# Altium PCB PCB3_Datchiki.PcbDoc
Units mm, origin at the board's own origin, x right, y up, seen from the top; angles counter-clockwise.
Board outline 25 x 25 mm, 2 copper layers (Top Layer, Bottom Layer), stack 1.57 mm thick; 16 components, 37 nets, 54 pads, 21 vias.
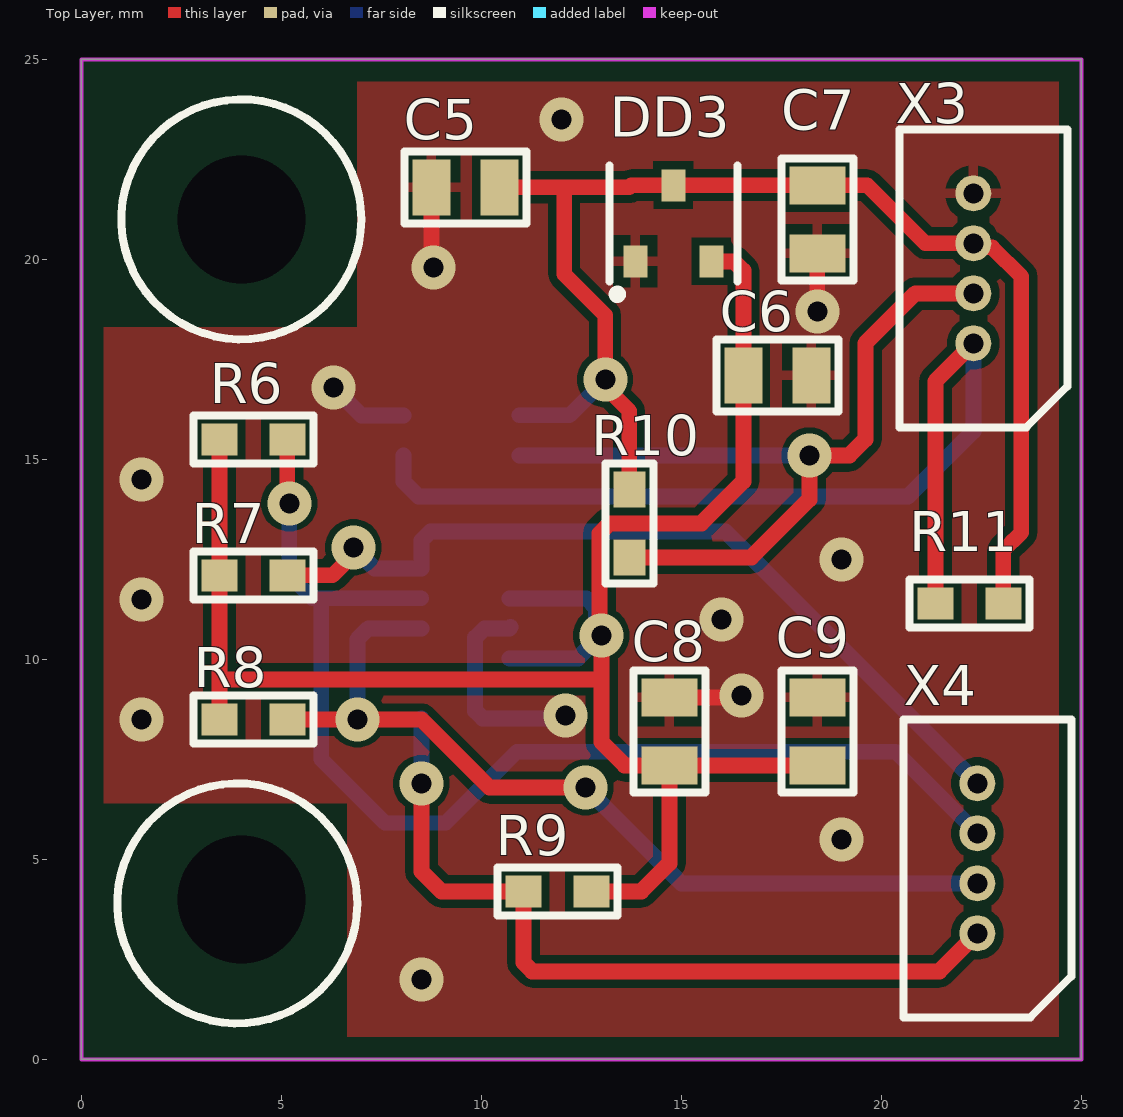
[diagram p0: Top Layer view]
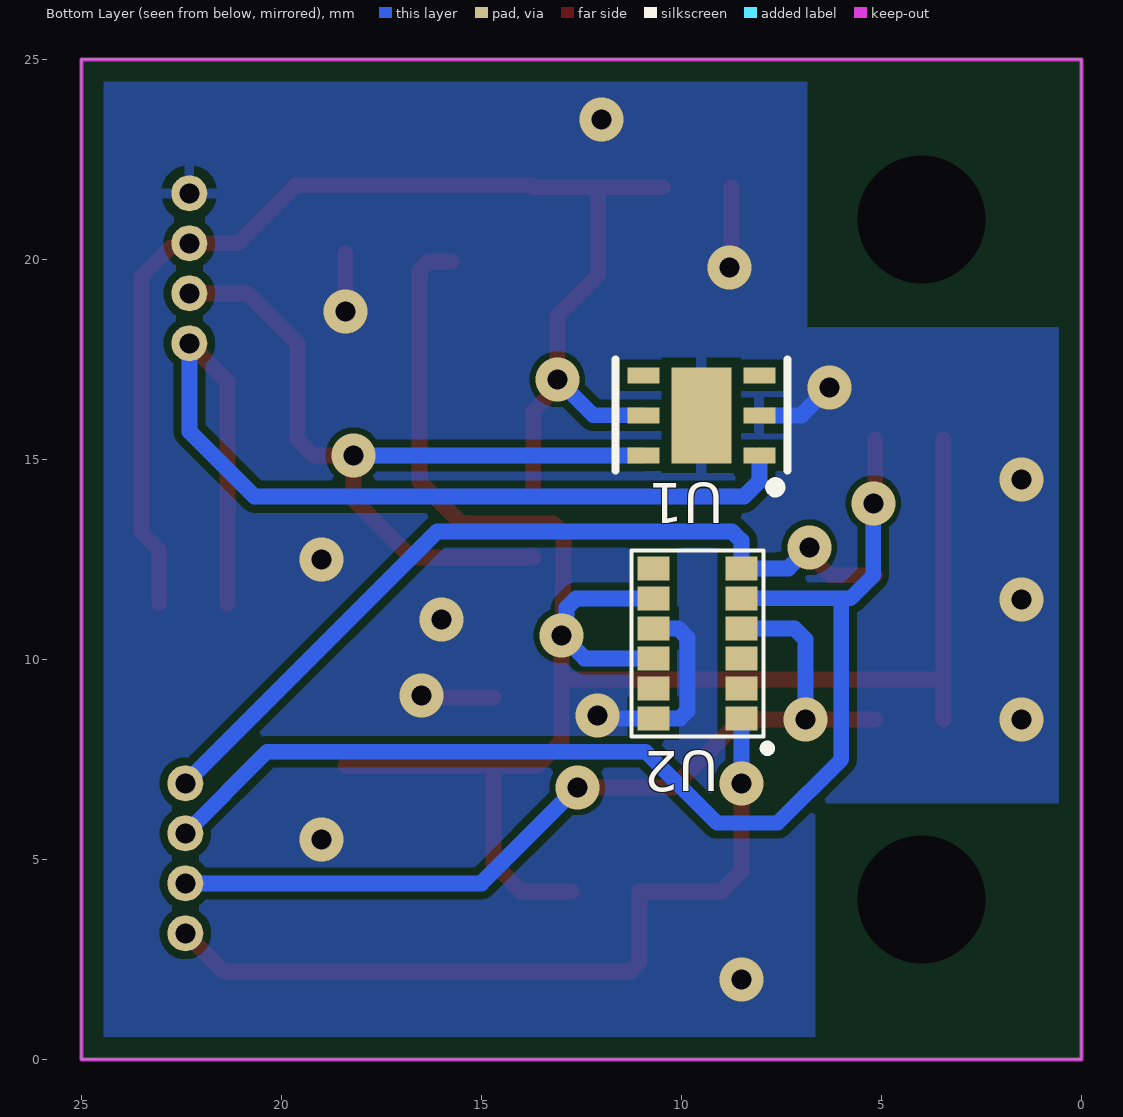
[diagram p1: Bottom Layer view, seen from below]
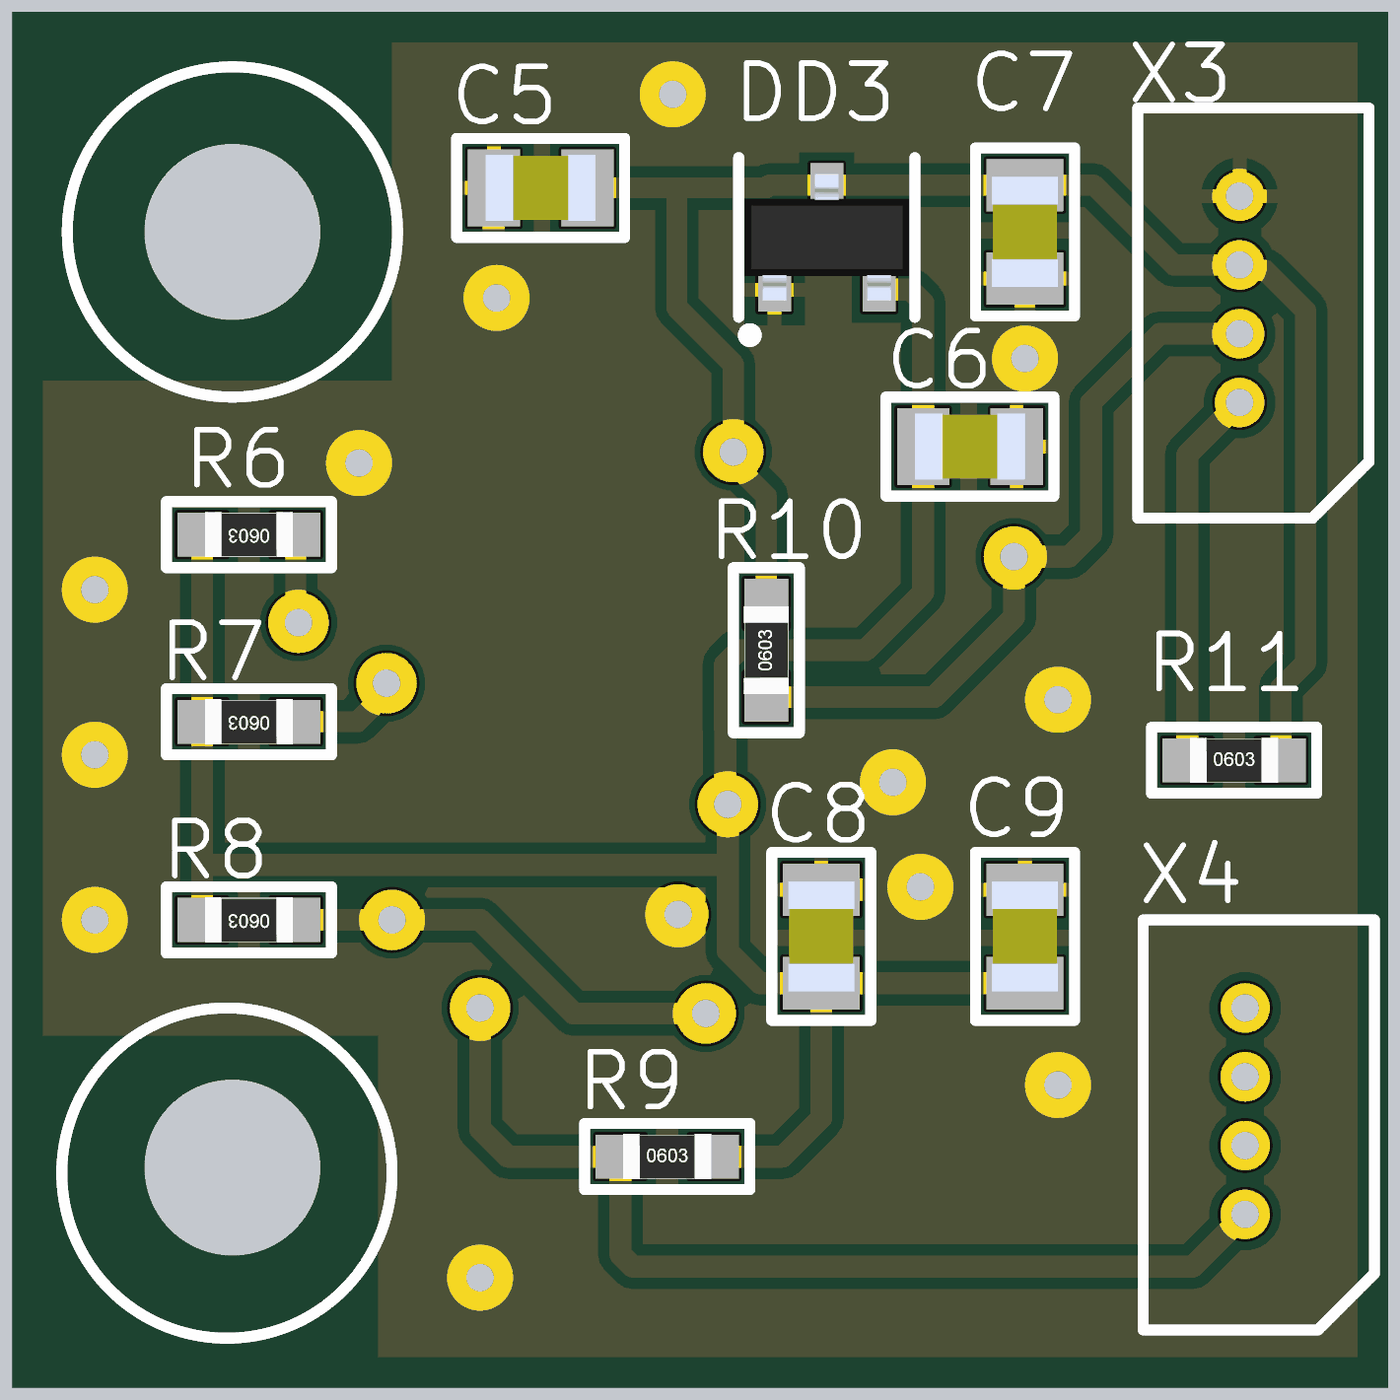
[diagram p2: 3D render of the assembled board from above, using the file's embedded part models]

## Layer stack, top to bottom
Top Solder: solder mask 0.01, Solder Resist, Dk 3.5
Top Layer: signal copper 0.035
Dielectric 1: dielectric 1.5, FR-4, Dk 4.8
Bottom Layer: signal copper 0.035
Bottom Solder: solder mask 0.01, Solder Resist, Dk 3.5

## Board outline
0,0 0,25 25,25 25,0

## Design rules (kind name [scope] priority, off if disabled: settings)
AcuteAngle [All] p1: minimum=6.00000000000000E+0001 checktracksonly=FALSE
Clearance Clearance_KeepOutLayer [OnLayer('Keep-Out Layer')] p1: gap=0.5 ignorepadtopadclearanceinfootprint=FALSE
Clearance [All] p2: gap=0.15 ignorepadtopadclearanceinfootprint=FALSE except(0.2: Track-Fill Track-Poly Track-Region SMDPad-Fill SMDPad-Poly SMDPad-Region THPad-Fill THPad-Poly THPad-Region Fill-Fill Fill-Poly Fill-Region Poly-Poly Poly-Region Region-Region)
ComponentClearance [All] p1: gap=0.2 collisioncheckmode=3 verticalgap=0.2 showdistances=FALSE
HoleSize [All] p1: absolutevalues=TRUE maxlimit=3.2 minlimit=0.3 maxpercent=80.000 minpercent=20.000
HoleToHoleClearance [All] p1: gap=0.2 allowstackedmicrovias=TRUE
MinimumAnnularRing [All] p1: minimumring=0.2
MinimumSolderMaskSliver [All] p1: minsoldermaskwidth=0.09
PolygonConnect PolygonConnect_Via [IsVia] p1: connectstyle=Direct reliefconductorwidth=0.254 reliefentries=4 polygonreliefangle="90 Angle" airgapwidth=0.254
PolygonConnect [All] p2: connectstyle=Relief reliefconductorwidth=0.25 reliefentries=4 polygonreliefangle="90 Angle" airgapwidth=0.25
RoutingVias [All] p1: holewidth=0.4 width=0.9 viastyle="Through Hole" minholewidth=0.3 minwidth=0.7 maxholewidth=0.5 maxwidth=1.1
SMDEntry [All] p1: side=TRUE corner=TRUE anyangle=FALSE
SMDNeckDown [All] p1: percent=100.000
SMDToCorner [All] p1: distance=0
SMDToPlane [All] p1: distance=0
SilkToSilkClearance [All] p1: silktosilkclearance=0
SilkToSolderMaskClearance [IsPad] p1: minsilkscreentomaskgap=0 clearancetoexposedcopper=FALSE
SolderMaskExpansion [All] p1: expansion=0.05 istentingtop=FALSE
Width [All] p1: maxlimit=5 minlimit=0.15 preferedwidth=0.25
24 further rules are at their usual default settings.

## Components (designator, comment, footprint, x,y, rotation, side; value= is the part's Value field where it differs from the comment)
C5 "1 мкФ" CAP_0805 9.6,21.8 r180 top
C6 "1 мкФ" CAP_0805 17.4,17.1 r0 top
C7 "100 нФ" CAP_0805 18.4,21 r90 top
C8 "4.7 мкФ" CAP_0805 14.7,8.2 r90 top
C9 "100 нФ" CAP_0805 18.4,8.2 r90 top
DD3 "XC6206P282MR" SOT-23-3_STAB_POWER 14.8,20.9 r0 top
R6 "47 кОм" RES_0603 4.3,15.5 r180 top
R7 "47 кОм" RES_0603 4.3,12.1 r180 top
R8 "47 кОм" RES_0603 4.3,8.5 r180 top
R9 "47 кОм" RES_0603 11.9,4.2 r0 top
R10 "10 кОм" RES_0603 13.7,13.4 r90 top
R11 "10 кОм" RES_0603 22.2,11.4 r0 top
U1 "HPP845E034R5" HTU20D(F) 9.5,16.1 r0 top
U2 "VL6180XV0NR/1" SOP12 9.6,10.4 r270 top
X3 "SCT1251WV-4P" Raziem4(1)_1.25mm 22.3,19.15 r90 top
X4 "SCT1251WV-4P" Raziem4(1)_1.25mm 22.4,4.4 r90 top

## Footprints (in the part's own frame and the unit in brackets; to place one, negate y for a bottom-side part, rotate by r counter-clockwise, add the part's x,y. Pads: shape width x height; smd on the part's side, far side on the other; paste and mask are expansions set on the pad)
CAP_0805 [mm]
  rect 0.95x1.4 smd: 1(-0.85,0) 2(0.85,0)
  silkscreen extent -1.53,-0.9 1.53,0.9, body extent -1,-0.6 1,0.6, height 0.9
HTU20D(F) [mm]
  rect 0.8x0.4 smd far side: 1(-1.45,-1) 2(-1.45,0) 3(-1.45,1) 4(1.45,1) 5(1.45,0) 6(1.45,-1)
  rect 1.5x2.4 smd far side: 2(0,0)
Raziem4(1)_1.25mm [mm]
  round 0.9 hole 0.5: 1(-1.25,0) 2(0,0) 3(1.25,0) 4(2.5,0)
  silkscreen extent -3.35,-2.35 4.1,1.85, body extent -2.75,-1.75 4,1.75, height 4.7
RES_0603 [mm]
  rect 0.9x0.8 smd: 1(-0.85,0) 2(0.85,0)
  silkscreen extent -1.5,-0.6 1.5,0.6, body extent -0.8,-0.41 0.8,0.41, height 0.45
SOP12 [mm]
  rect 0.6x0.8 smd far side: 1(1.875,-1.1) 2(1.125,-1.1) 3(0.375,-1.1) 4(-0.375,-1.1) 5(-1.125,-1.1) 6(-1.875,-1.1) 7(-1.875,1.1) 8(-1.125,1.1) 9(-0.375,1.1) 10(0.375,1.1) 11(1.125,1.1) 12(1.875,1.1)
SOT-23-3_STAB_POWER [mm]
  rect 0.6x0.8 smd: 1(-0.95,-0.95) 2(0,0.95) 3(0.95,-0.95)
  silkscreen extent -1.6,-1.87 1.6,1.45, body extent -1.5,-1.15 1.5,1.15, height 1.1

## Part data
C5 C6 C7 C8 C9: library part Condensator
DD3: library part Stability_power, Name=XC6206P282MR
R6 R7 R8 R9 R10 R11: library part Rezistor
U1: library part Datchik_vlaj_temp, Name=HPP845E034R5
U2: library part Datchik_osvet, Name=VL6180XV0NR/1
X3: library part Raziem_4KONTKTA_1, Name=SCT1251WV-4P
X4: library part Raziem_4KONTKTA, Name=SCT1251WV-4P

## Free pads (board coordinates)
  round 0 hole 3.2 unplated: 1(4,4) 1(4,21)

## Via types
v1: diameter 1.1, hole 0.5, Top Layer to Bottom Layer, 21 vias

## Nets (pads, with @x,y where several pads share a name; then routed paths per layer and width w, separated by ;. In a path a pad name is that pad's centre, name@x,y a point inside that pad or via, vN(x,y) a via of type N, cw(c..) or ccw(c..) an arc to the next point about the centre after c; other vN are vias at no path point)
GND: C5.2 C6.2 C7.1 C8.2 C9.2 DD3.1 U1.2 U2.9 U2.12 X3.4 | length 12.5
  Top Layer w0.381: v1(18.4,18.7) C7.1
  Top Layer w0.4: C5.2 8.75,19.85 v1(8.8,19.8) ; C8.2 16.45,9.05 v1(16.5,9.1)
  Bottom Layer w0.4: v1(6.3,16.8) 7,16.1 U1.2@8.05,16.1 ; U2.9@10.731,10.806 U2.9 10.081,10.775 9.846,10.541 9.846,8.713 10.034,8.525 12.025,8.525 v1(12.1,8.6)
  other v1: 8.5,2 19,5.5 1.5,8.5 16,11 1.5,11.5 19,12.5 1.5,14.5 12,23.5
NetC1_1: 
NetC2_1: 
NetC3_2: 
NetC4_1: C5.1 C7.2 DD3.2 R10.2 R11.2 U1.5 X3.3 | length 33.1
  Top Layer w0.381: C5.1 12.075,21.8 ; R10.2 13.7,16.205 13.1,16.805 v1(13.1,17) 13.1,18.6 12.075,19.625 12.075,21.8 ; R11.2 23.05,12.727 23.273,12.95 23.277,12.95 23.5,13.173 23.5,19.571 22.77,20.301 22.399,20.301 X3.3 21.1,20.4 19.65,21.85 DD3.2 13.75,21.85 13.7,21.8 12.075,21.8
  Bottom Layer w0.381: U1.5 12.2,16.1 v1(13.1,17)
NetC6_1: C6.1 C8.1 C9.1 DD3.3 R6.2 R7.2 R8.2 R9.2 U2.8 U2.10 | length 48
  Top Layer w0.4: R8.2 3.45,9.5 ; R6.2 R7.2 3.45,9.5 ; R9.2 14,4.2 14.7,4.9 C8.1 ; DD3.3 16.316,19.95 16.55,19.716 C6.1 16.55,14.45 15.5,13.4 13.205,13.4 12.95,13.145 12.95,11.955 12.955,11.95 12.955,10.645 v1(13,10.6) 13,9.5 ; C9.1 C8.1 ; 3.45,9.5 13,9.5 ; 13,9.5 13,7.934 13.584,7.35 C8.1
  Bottom Layer w0.4: U2.10 12.416,10.025 12.991,10.6 v1(13,10.6) 12.866,10.734 12.866,11.289 12.63,11.525 U2.8
NetC10_2: 
NetC11_2: 
NetC14_2: 
NetC16_1: 
NetC17_1: 
NetC18_1: 
NetC19_1: 
NetC20_1: 
NetC21_1: 
NetDD2_1: 
NetDD2_5: 
NetDD4_4: R11.1 U1.1 X3.1 | length 24.8
  Top Layer w0.4: R11.1 21.35,16.95 X3.1
  Bottom Layer w0.4: U1.1 8.05,14.45 8.434,14.066 20.666,14.066 22.3,15.7 X3.1
NetDD4_5: R10.1 U1.6 X3.2 | length 20.6
  Top Layer w0.4: R10.1 16.75,12.55 18.2,14 v1(18.2,15.1) 19.2,15.1 19.6,15.5 19.6,17.9 20.85,19.15 X3.2
  Bottom Layer w0.4: U1.6 v1(18.2,15.1)
NetDD4_6: R9.1 U2.1 X4.1 | length 20.2
  Top Layer w0.4: v1(8.5,6.9) 8.5,4.7 9,4.2 R9.1 11.05,2.423 11.273,2.2 21.45,2.2 X4.1
  Bottom Layer w0.4: v1(8.5,6.9) U2.1
NetDD4_7: R8.1 U2.4 X4.2 | length 22.7
  Top Layer w0.4: R8.1 v1(6.9,8.5) 8.5,8.5 10.2,6.8 v1(12.6,6.8)
  Bottom Layer w0.4: v1(6.9,8.5) 6.9,10.5 7.175,10.775 U2.4 ; v1(12.6,6.8) 15,4.4 X4.2
NetDD4_8: R6.1 U2.5 X4.3 | length 29.6
  Top Layer w0.381: R6.1 5.15,13.95 v1(5.2,13.9)
  Bottom Layer w0.381: v1(5.2,13.9) 5.2,12.1 5.775,11.525 6,11.525 ; U2.5 6,11.525 ; X4.3 20.36,7.691 10.891,7.691 9.109,5.909 7.591,5.909 6,7.5 6,11.525
NetDD4_9: R7.1 U2.6 X4.4 | length 21.3
  Top Layer w0.381: R7.1 6.277,12.1 6.8,12.623 v1(6.8,12.8)
  Bottom Layer w0.4: v1(6.8,12.8) 7.325,12.275 U2.6 8.5,12.966 8.734,13.2 16.1,13.2 X4.4
NetDD4_10: 
NetDD4_11: 
NetDD4_21: 
NetDD4_24: 
NetDD4_25: 
NetDD4_26: 
NetDD4_47: 
NetHL1_K: 
NetHL2_A: 
NetL1_2: 
NetL3_2: 
NetR2_1: 
NetR3_2: 
NetSB1_1: 
pads on no net: U1.3 U1.4 U2.2 U2.3 U2.7 U2.11

## Polygon pours and split planes (outlines as drawn)
GND on Top Layer "Top Layer-GND" (solid, remove dead copper, pour order 0): 0,25 25,25 25,0 0,0
GND on Bottom Layer "Bottom Layer-GND" (solid, remove dead copper, pour order 1): 0,25 25,25 25,0 0,0

## Keep-outs
Keep-Out Layer:
  the board outline again, w0.1

## Other copper
Top Layer:
  pour cut-out: 0.5,24.5 6.9,24.5 6.9,18.3 0.5,18.3
  pour cut-out: 0.5,6.4 6.65,6.4 6.65,0.5 0.5,0.5
Bottom Layer:
  pour cut-out: 0.5,24.5 6.85,24.5 6.85,18.3 0.5,18.3
  pour cut-out: 0.5,6.4 6.65,6.4 6.65,0.5 0.5,0.5

## Silkscreen, mask and mechanical layers (free items; w line width, h text height)
Top Overlay:
  circle w0.2: c4,21 r3
  circle w0.2: c3.9,3.9 r3